# EAGLE board M20050-1 GPS sensor breakout board (EAGLE 9.5.0)
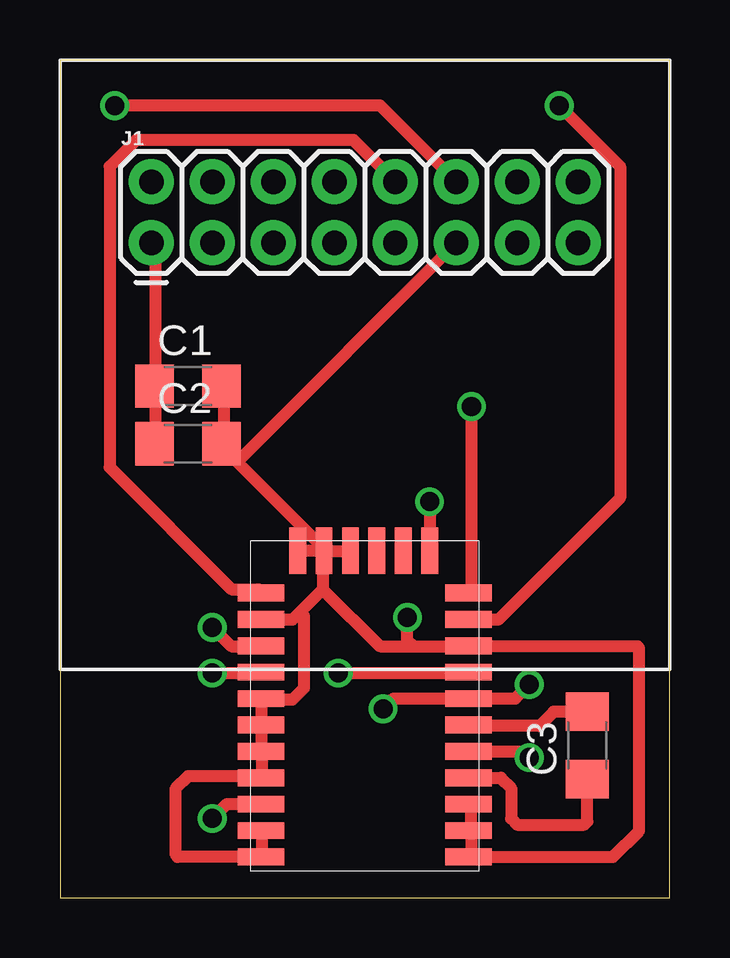
[diagram p0: board, top side]
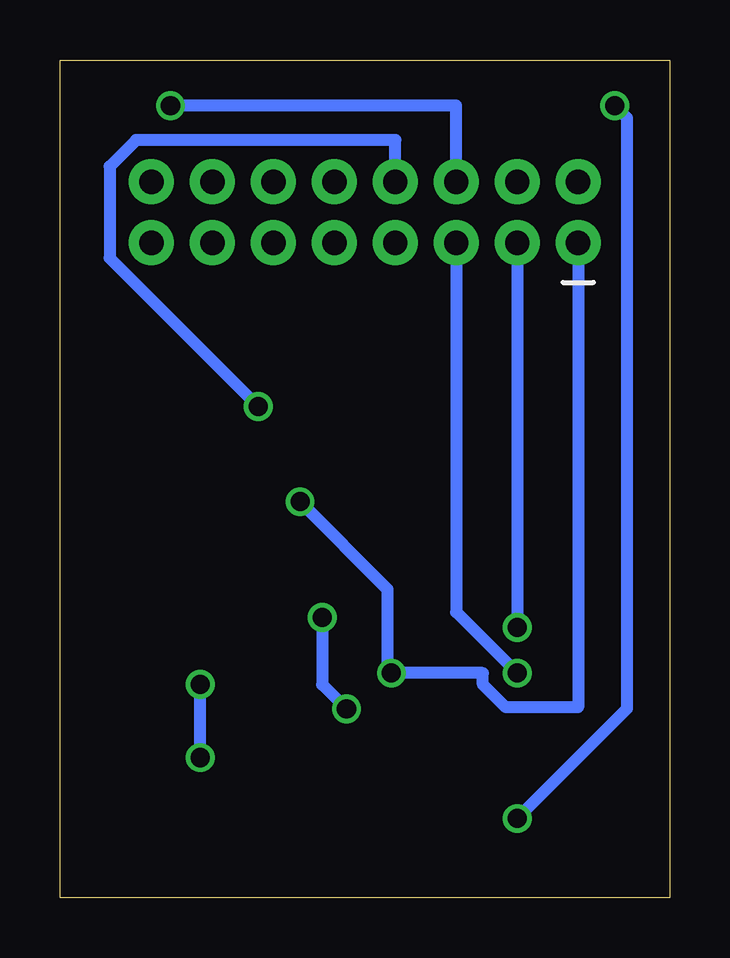
[diagram p1: board, bottom side, seen from below]

Size 25.4 x 34.92 mm. Coordinates in mm from the lower left corner, seen from the top.
Outline: 0,0 25.4,0 25.4,34.92 0,34.92 0,0
Copper layers (1*16): Top 0.035mm / dielectric 1.5mm / Bottom 0.035mm
Design rules "default *": minimum track width 20mil, minimum drill 31.25mil, track to track 18mil, track to pad 18mil, pad to pad 6mil, via to via 18mil, smd to smd 6mil, copper to edge 40mil, drill to drill 6mil, minimum pad ring 10mil, minimum via ring 8mil, stop-mask expansion 4mil, vias tented up to drill 0mil, thermal gap 10mil
tKeepout: area 9.5,0 to 15.9,6.3
tRestrict: area 9.5,0 to 15.9,6.3

## Footprints (pad centres in the part's own frame; a part is rotated, then mirrored left to right if it is on the bottom)
M20050-1_GPS = smd 1.94 x 0.7: P1 -4.32,6.3; P2 -4.32,5.2; P3 -4.32,4.1; P4 -4.32,3; P5 -4.32,1.9; P6 -4.32,0.8; P7 -4.32,-0.3; P8 -4.32,-1.4; P9 -4.32,-2.5; P10 -4.32,-3.6; P11 -4.32,-4.7; P18 4.32,-4.7; P19 4.32,-3.6; P20 4.32,-2.5; P21 4.32,-1.4; P22 4.32,-0.3; P23 4.32,0.8; P24 4.32,1.9; P25 4.32,3; P26 4.32,4.1; P27 4.32,5.2; P28 4.32,6.3 | smd 0.7 x 1.94: P12 -2.7,-6.47; P13 -1.6,-6.47; P14 -0.5,-6.47; P15 0.6,-6.47; P16 1.7,-6.47; P17 2.8,-6.47
C1206 = smd 1.6 x 1.8: 1 -1.4,0; 2 1.4,0
2X7 = drill 1.016 pad 1.88: 1 -8.89,5.08; 2 -8.89,7.62; 3 -6.35,5.08; 4 -6.35,7.62; 5 -3.81,5.08; 6 -3.81,7.62; 7 -1.27,5.08; 8 -1.27,7.62; 9 1.27,5.08; 10 1.27,7.62; 11 3.81,5.08; 12 3.81,7.62; 13 6.35,5.08; 14 6.35,7.62; 15 8.89,5.08; 16 8.89,7.62

## Placement (x,y rotation side)
A1  [M20050-1_GPS]  12.7,8 180 top
C1  22 pF  [C1206]  5.33,21.34 0 top
C2  22 pF  [C1206]  5.33,18.92 0 top
C3  22 pF  [C1206]  21.97,6.35 90 top
J1  2X6 FEMALE  [2X7]  12.7,22.23 0 top

## Library data of the parts
A1 C1-C3 = RTR
J1 = RTR; PROD_ID: CONN-12423

## Nets
N$1: A1.P8 A1.P12 C1.1 C2.1 J1.1
N$2: A1.P20 J1.3
N$3: A1.P1 A1.P2 A1.P3 A1.P5 A1.P7 A1.P9 A1.P15 A1.P16 A1.P17 A1.P19 A1.P22 A1.P23 A1.P24 A1.P25 A1.P27 A1.P28 C1.2 C2.2 J1.11
N$4: A1.P21 J1.5
N$5: A1.P4 C3.1
N$6: A1.P6 C3.2
N$7: A1.P26 J1.12
N$8: A1.P18 J1.10
N$9: A1.P11 J1.8
N$10: A1.P10 J1.6

## Tracks (layer width: path | path; a pad name or v marks a point on that pad's centre or on a via)
N$1  (via drill 0.79)
  Top 0.508: C2.1 3.97,19.05 3.97,21.27 C1.1 3.97,21.59 3.97,27.15 J1.1 | v11.59,9.37 16.99,9.37 A1.P8 | v15.4,16.51 15.4,14.61 A1.P12
  Bottom 0.508: J1.1 3.81,7.94 6.83,7.94 7.78,8.89 7.78,9.37 v11.59,9.37 11.75,9.53 11.75,12.86 v15.4,16.51
N$2  (via drill 0.79)
  Top 0.508: v6.35,11.27 7.14,10.48 8.26,10.48 A1.P20
  Bottom 0.508: J1.3 v6.35,11.27
N$3  (via drill 0.79)
  Top 0.508: 8.41,5.08 8.41,6.03 A1.P24 | 8.41,5.08 A1.P25 | A1.P24 8.41,6.35 8.41,7.14 A1.P23 8.41,7.3 8.41,8.26 A1.P22 8.57,8.26 9.68,8.26 10.16,8.73 10.16,11.75 10,11.91 | 8.26,2.7 A1.P27 8.41,2.7 8.41,1.75 A1.P28 4.9,1.7 4.83,1.78 4.83,4.57 5.33,5.08 8.41,5.08 | 8.26,6.19 A1.P24 | C2.2 6.83,19.05 6.83,21.27 C1.2 | 10.95,12.86 10,11.91 | 10,11.91 9.68,11.59 8.41,11.59 A1.P19 | 10.95,12.86 10.95,14.45 A1.P16 | A1.P17 10,14.45 10.79,14.45 A1.P16 | A1.P15 12.06,14.45 11.11,14.45 A1.P16 | 14.73,10.48 13.34,10.48 10.95,12.86 | 14.73,10.48 16.99,10.48 A1.P9 17.14,10.48 24.07,10.48 24.13,10.41 24.13,2.79 23.04,1.7 A1.P1 17.14,1.75 17.14,2.7 A1.P2 17.14,3.02 17.14,3.81 A1.P3 17.3,3.81 | C2.2 6.83,18.73 10.95,14.61 A1.P16 | J1.11 7.46,18.26 C2.2 | 14.73,10.48 14.48,10.73 v14.48,11.68 | v13.46,7.87 13.89,8.3 A1.P7 18.97,8.3 v19.56,8.89 | A1.P5 19.3,6.1 v19.56,5.84
  Bottom 0.508: v14.48,11.68 14.48,8.89 v13.46,7.87 | v19.56,5.84 v19.56,8.89
N$4  (via drill 0.79)
  Top 0.508: v6.35,9.37 8.26,9.37 A1.P21
  Bottom 0.508: v6.35,9.37 8.89,11.91 J1.5
N$5
  Top 0.508: 21.92,5 C3.1 21.97,3.17 21.84,3.05 19.05,3.05 18.8,3.3 18.8,4.57 18.37,5 A1.P4
N$6
  Top 0.508: 21.42,7.2 C3.2 20.57,7.75 19.98,7.16 17.06,7.16 A1.P6
N$7  (via drill 0.79)
  Top 0.508: J1.12 13.34,33.02 v2.29,33.02 | A1.P26 6.95,3.9 v6.35,3.3
  Bottom 0.508: v6.35,3.3 1.78,7.87 1.78,32.51 v2.29,33.02
N$8
  Top 0.508: J1.10 12.22,31.59 3.17,31.59 2.06,30.48 2.06,17.94 7.14,12.86 8.26,12.86 A1.P18
N$9  (via drill 0.79)
  Top 0.508: v17.14,20.48 17.14,12.86 A1.P11
  Bottom 0.508: v17.14,20.48 23.34,26.67 23.34,30.48 22.23,31.59 11.43,31.59 J1.8
N$10  (via drill 0.79)
  Top 0.508: v20.8,33.02 23.34,30.48 23.34,16.67 18.26,11.59 17.14,11.59 A1.P10
  Bottom 0.508: v20.8,33.02 8.89,33.02 J1.6